# Altium PCB CE-Amplifier.PcbDoc
Units mil, origin at the board's own origin, x right, y up, seen from the top; angles counter-clockwise.
Board outline 1070 x 2000 mil, 2 copper layers (Top Layer, Bottom Layer); 10 components, 8 nets, 21 pads, 0 vias.
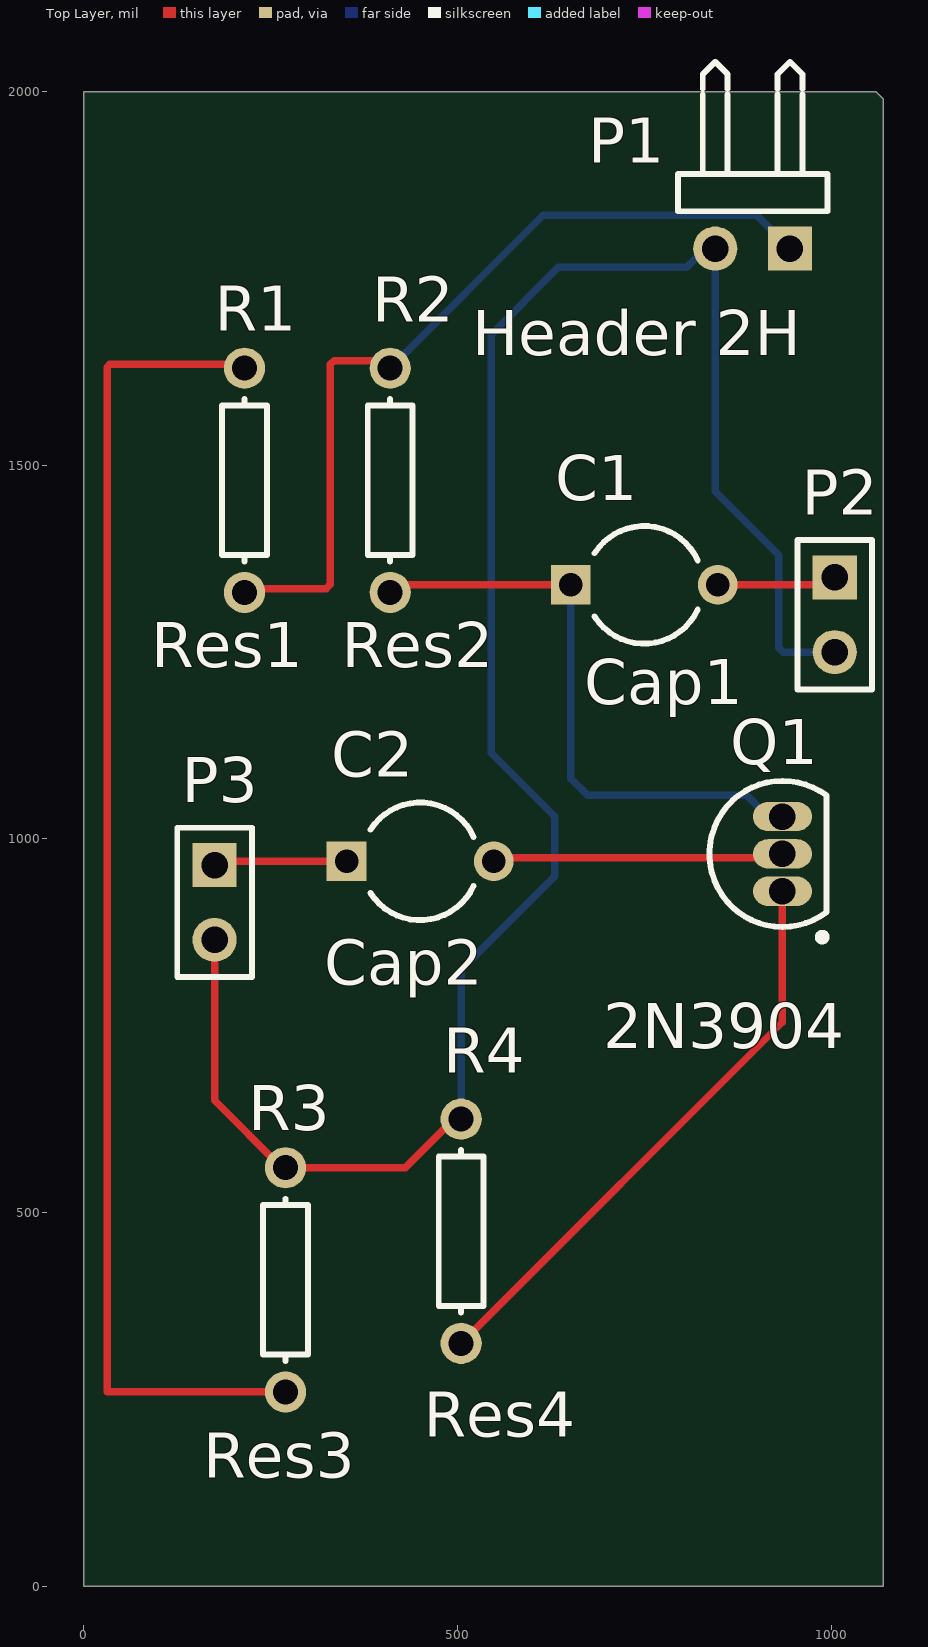
[diagram p0: Top Layer view]
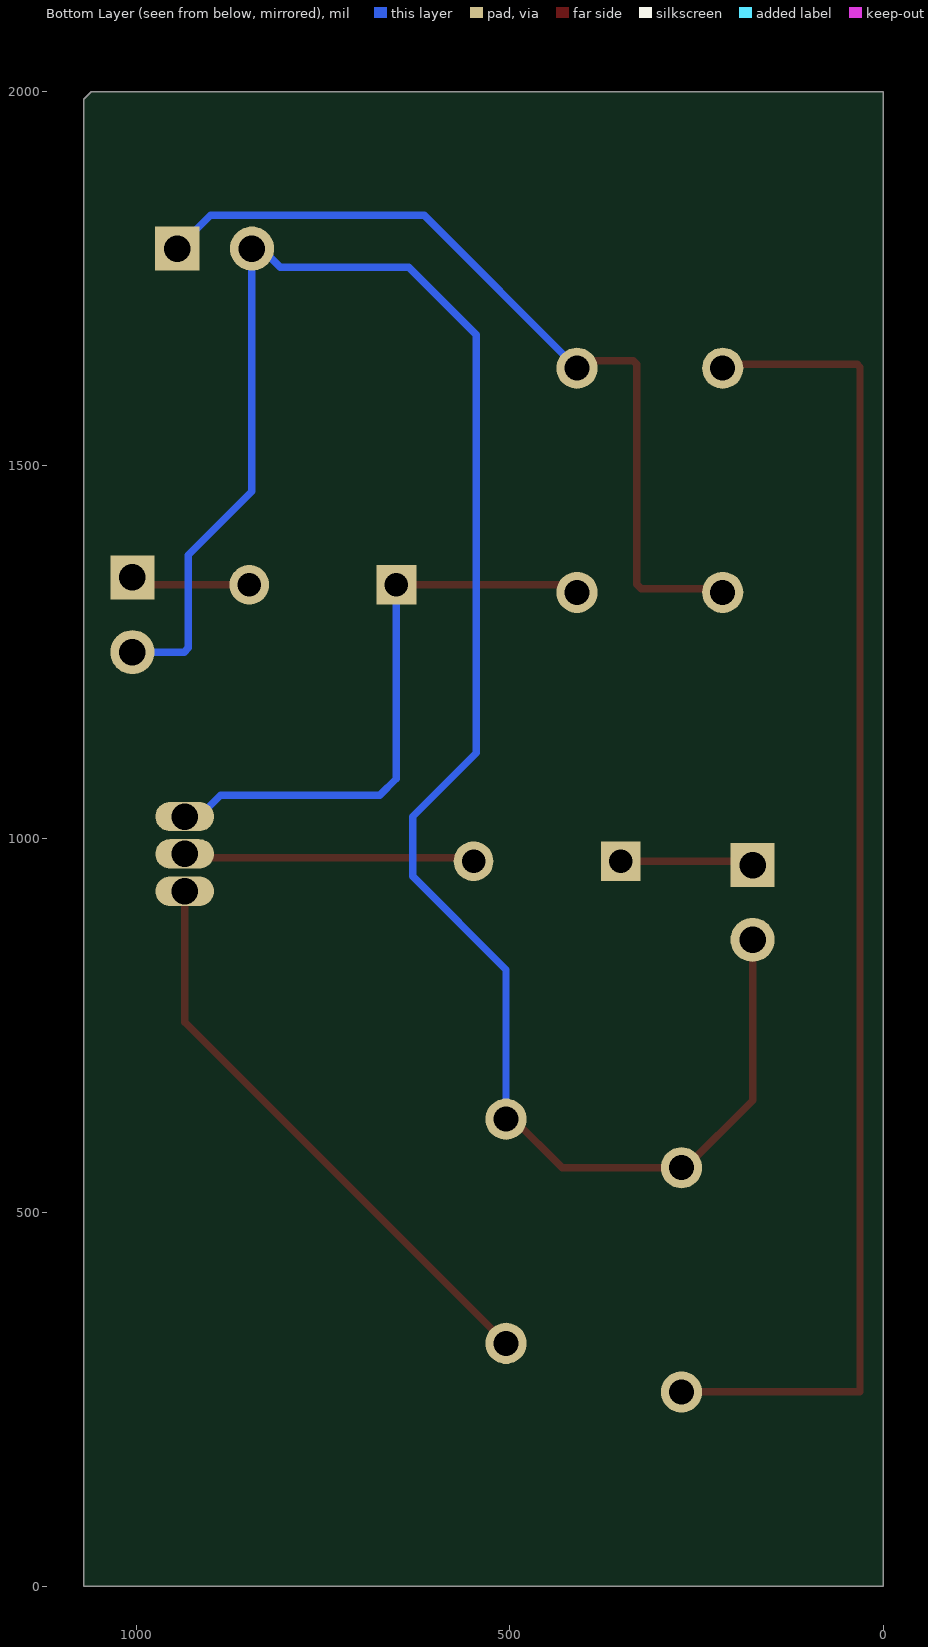
[diagram p1: Bottom Layer view, seen from below]

## Layer stack, top to bottom
Top Solder: solder mask 0.4, Solder Resist, Dk 3.5
Top Layer: signal copper 1.4
Dielectric 1: dielectric 12.6, FR-4, Dk 4.8
Bottom Layer: signal copper 1.4
Bottom Solder: solder mask 0.4, Solder Resist, Dk 3.5

## Board outline
0,0 1070,0 1070,1990 1060,2000 0,2000

## Design rules (kind name [scope] priority, off if disabled: settings)
Clearance [All] p1: gap=10 ignorepadtopadclearanceinfootprint=FALSE except(0: Arc-Hole Track-Hole SMDPad-Hole THPad-Hole Via-Hole Fill-Hole Poly-Hole Region-Hole Text-Hole)
MinimumSolderMaskSliver [All] p1: minsoldermaskwidth=0.04
PolygonConnect [All] p1: connectstyle=Relief reliefconductorwidth=10 reliefentries=4 polygonreliefangle="90 Angle" airgapwidth=10
RoutingVias [All] p1: holewidth=28 width=50 viastyle="Through Hole" minholewidth=28 minwidth=50 maxholewidth=28 maxwidth=50
SilkToSolderMaskClearance [IsPad] p1: minsilkscreentomaskgap=0.05 clearancetoexposedcopper=TRUE
SolderMaskExpansion [All] p1: expansion=4 istentingtop=FALSE
Width [All] p1: maxlimit=10 minlimit=10 preferedwidth=10
28 further rules are at their usual default settings.

## Classes and differential pairs
component class Amplifier: C1 C2 P1 P2 P3 Q1 R1 R2 R3

## Components (designator, comment, footprint, x,y, rotation, side; value= is the part's Value field where it differs from the comment)
C1 "Cap1" CAPR5-4X5 750,1340 r0 top value=100pF
C2 "Cap2" CAPR5-4X5 450,970 r0 top value=100pF
P1 "Header 2H" HDR1X2H 945,1790 r180 top
P2 "Header 2" HDR1X2 1005,1350 r270 top
P3 "Header 2" HDR1X2 175,965 r270 top
Q1 "2N3904" TO-92A 935,980 r0 top
R1 "Res1" AXIAL-0.3 215,1480 r90 top value=1K
R2 "Res2" AXIAL-0.3 410,1480 r90 top value=1K
R3 "Res3" AXIAL-0.3 270,410 r90 top value=1K
R4 "Res4" AXIAL-0.3 505,475 r90 top value=1K

## Footprints (in the part's own frame and the unit in brackets; to place one, negate y for a bottom-side part, rotate by r counter-clockwise, add the part's x,y. Pads: shape width x height; smd on the part's side, far side on the other; paste and mask are expansions set on the pad)
AXIAL-0.3 [mm] "Axial Device, Thru-Hole; 2 Leads; 0.3 in Pin Spacing"
  round 1.4 hole 0.85: 1(-3.81,0) 2(3.81,0)
  silkscreen extent -2.76,-0.76 2.76,0.76
CAPR5-4X5 [mm] "Capacitor; 2 Leads"
  rect 1.35x1.35 hole 0.8: 1(-2.5,0)
  round 1.35 hole 0.8: 2(2.5,0)
  silkscreen extent -1.69,-2 1.82,2
HDR1X2 [mm] "Connector; Header; 2 Position"
  rect 1.5x1.5 hole 0.9: 1(0,0)
  round 1.5 hole 0.9: 2(2.54,0)
  silkscreen extent -1.27,-1.27 3.81,1.27
HDR1X2H [mm] "Connector; Header; 2 Position; Right Angle"
  rect 1.5x1.5 hole 0.9: 1(0,0)
  round 1.5 hole 0.9: 2(2.54,0)
  silkscreen extent -1.27,-6.35 3.81,-1.27
TO-92A [mm] "TO, Flat Index; 3 In-Line, Axial Leads; Body Dia. 4.5mm; Leads 0.51 x 0.48 mm (max)"
  oval 2x1 hole 0.9: 1(0,-1.27) 2(0,0) 3(0,1.27)
  silkscreen extent -2.48,-2.95 1.5,2.48, body extent -2.48,-2.5 1.5,2.5, height 6.86

## Part data
C1: library part Cap2, "Capacitor", PackageDescription="Capacitor; 2 Leads", PackageReference=CAPR5-4X5, Published=23-Sep-2002, Publisher="Altium Limited"
C2: "Capacitor", PackageDescription="Capacitor; 2 Leads", PackageReference=CAPR5-4X5, Published=23-Sep-2002, Publisher="Altium Limited"
P1: "Header, 2-Pin, Right Angle", LatestRevisionDate=17-Jul-2002, LatestRevisionNote="Re-released for DXP Platform.", Publisher="Altium Limited"
P2 P3: "Header, 2-Pin", LatestRevisionDate=17-Jul-2002, LatestRevisionNote="Re-released for DXP Platform.", Publisher="Altium Limited"
Q1: "NPN General Purpose Amplifier", ComponentLink1Description="Manufacturer Link", ComponentLink1URL=http://www.fairchildsemi.com/, ComponentLink2Description=Datasheet, ComponentLink2URL=http://www.fairchildsemi.com/ds/2N%2F2N3904.pdf, DatasheetVersion=1997, LatestRevisionDate=15-Jan-2003, LatestRevisionNote="PCB Footprint 'BCY-W3/D4.7' replaced", PackageDescription="TO, Flat Index; 3 In-Line, Axial Leads; Body Dia. 4.5mm; Leads 0.51 x 0.48 mm (max)", PackageReference=TO-92A, PackageVersion=Sep-1998, Published=8-Jun-2000, Publisher="Altium Limited"
R1: "Resistor", LatestRevisionDate=17-Jul-2002, LatestRevisionNote="Re-released for DXP Platform.", PackageDescription="Axial Device, Thru-Hole; 2 Leads; 0.3 in Pin Spacing", PackageReference=AXIAL-0.3, Published=8-Jun-2000, Publisher="Altium Limited"
R2 R3 R4: library part Res1, "Resistor", LatestRevisionDate=17-Jul-2002, LatestRevisionNote="Re-released for DXP Platform.", PackageDescription="Axial Device, Thru-Hole; 2 Leads; 0.3 in Pin Spacing", PackageReference=AXIAL-0.3, Published=8-Jun-2000, Publisher="Altium Limited"

## Nets (pads, with @x,y where several pads share a name; then routed paths per layer and width w, separated by ;. In a path a pad name is that pad's centre, name@x,y a point inside that pad or via, vN(x,y) a via of type N, cw(c..) or ccw(c..) an arc to the next point about the centre after c; other vN are vias at no path point)
GND: P1.2 P2.2 P3.2 R3.2 R4.2 | length 2740.6
  Top Layer w10: P3.2 175,650 265,560 430,560 495,625 R4.2
  Bottom Layer w10: R4.2 505,825 630,950 630,1030 545,1115 545,1675 635,1765 807.03,1765 832.03,1790 P1.2 845,1465 930,1380 930,1255.86 935.86,1250 P2.2
NetR1_2: R1.2 R3.1 | length 1797.4
  Top Layer w10: R1.2 210,1635 35,1635 31.25,1631.25 31.25,260 R3.1
Vbe: C2.2 Q1.2 | length 392.3
  Top Layer w10: C2.2@546.85,970 551.85,975 930,975 Q1.2
VCC: P1.1 R1.1 R2.2 | length 1138
  Top Layer w10: R1.1 215,1340 220,1345 230,1335 324.14,1335 330,1340.86 330,1635 335,1640 R2.2@400,1640
  Bottom Layer w10: R2.2 614.53,1834.53 900.47,1834.53 P1.1
Vce: C1.1 Q1.3 R2.1 | length 865.4
  Top Layer w10: R2.1@412.59,1312.41 412.59,1315.2 400,1327.79 400,1340 630,1340 C1.1@645,1325
  Bottom Layer w10: C1.1@645,1355 645,1346.57 C1.1 651.57,1080.86 674.19,1058.24 887.08,1058.24 915.32,1030 Q1.3
Ve: Q1.1 R4.1 | length 793.1
  Top Layer w10: R4.1@515,325 R4.1 935,755 Q1.1
Vin: C2.1 P3.1 | length 150
  Top Layer w10: P3.1@200,970 C2.1@350,970
Vout: C1.2 P2.1 | length 160.7
  Top Layer w10: C1.2 995,1340 P2.1

## Silkscreen, mask and mechanical layers (free items; w line width, h text height)
Mechanical 1:
  lines w10: 0,0 0,2000 1070,2000 1070,0 0,0